# Altium PCB BTVN3.PcbDoc
Units mm, origin at the board's own origin, x right, y up, seen from the top; angles counter-clockwise.
Board outline 49.03 x 25.91 mm, 2 copper layers (Top Layer, Bottom Layer); 8 components, 5 nets, 25 pads, 0 vias.
Unrouted connection lines stored in the file: 1.
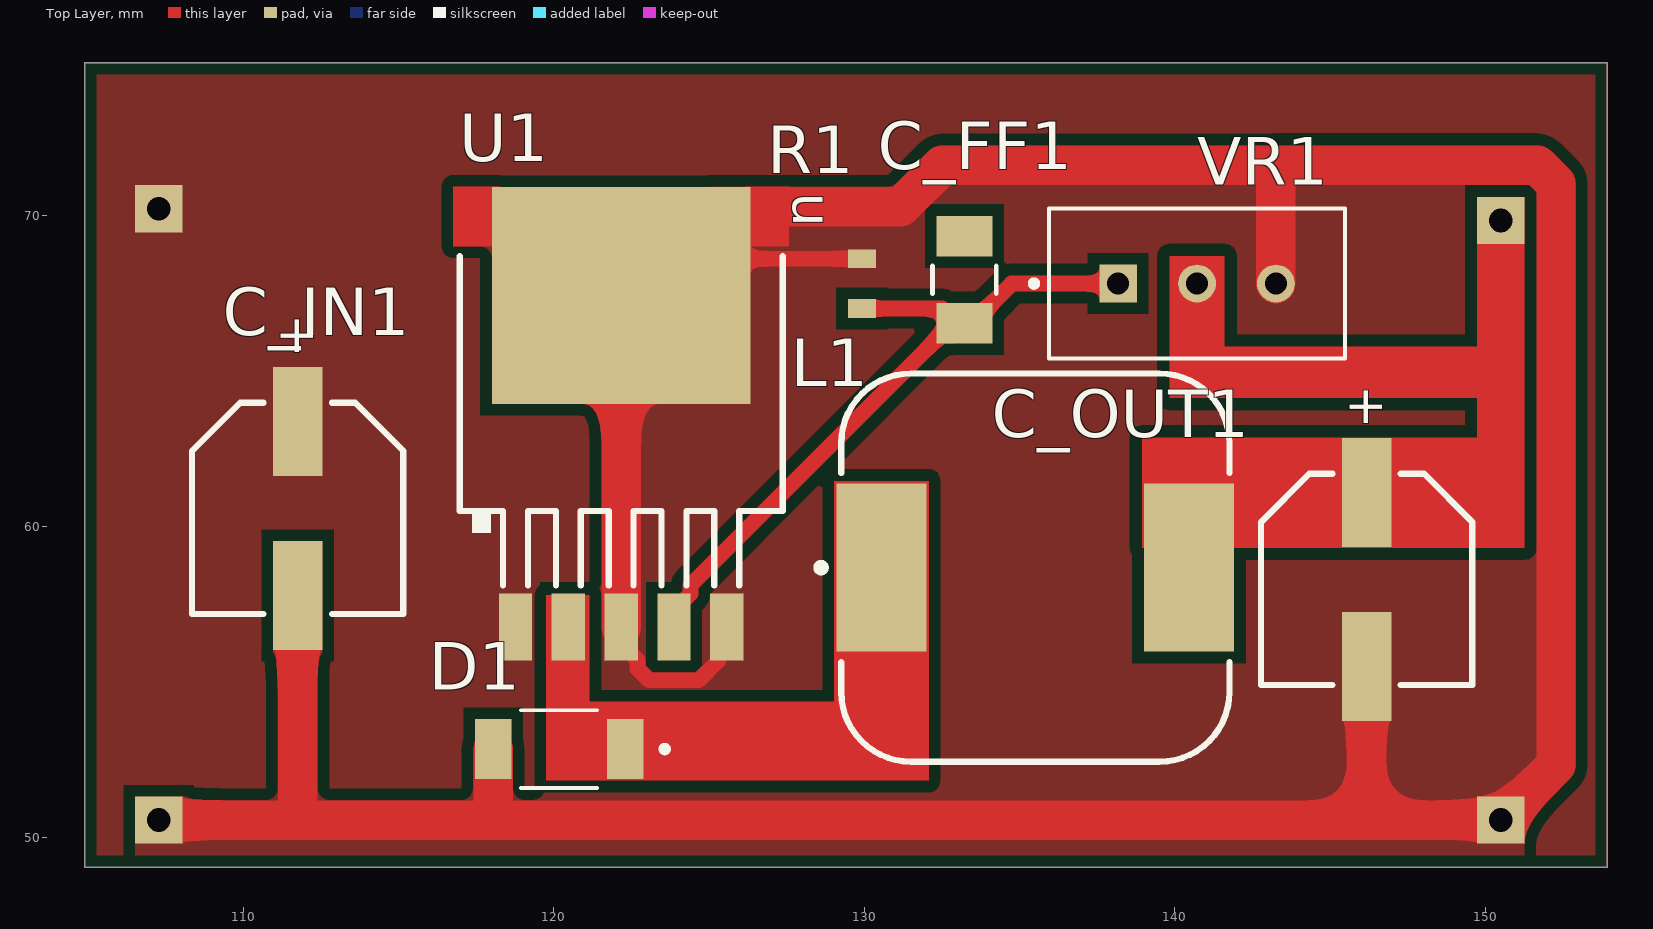
[diagram p0: Top Layer view]
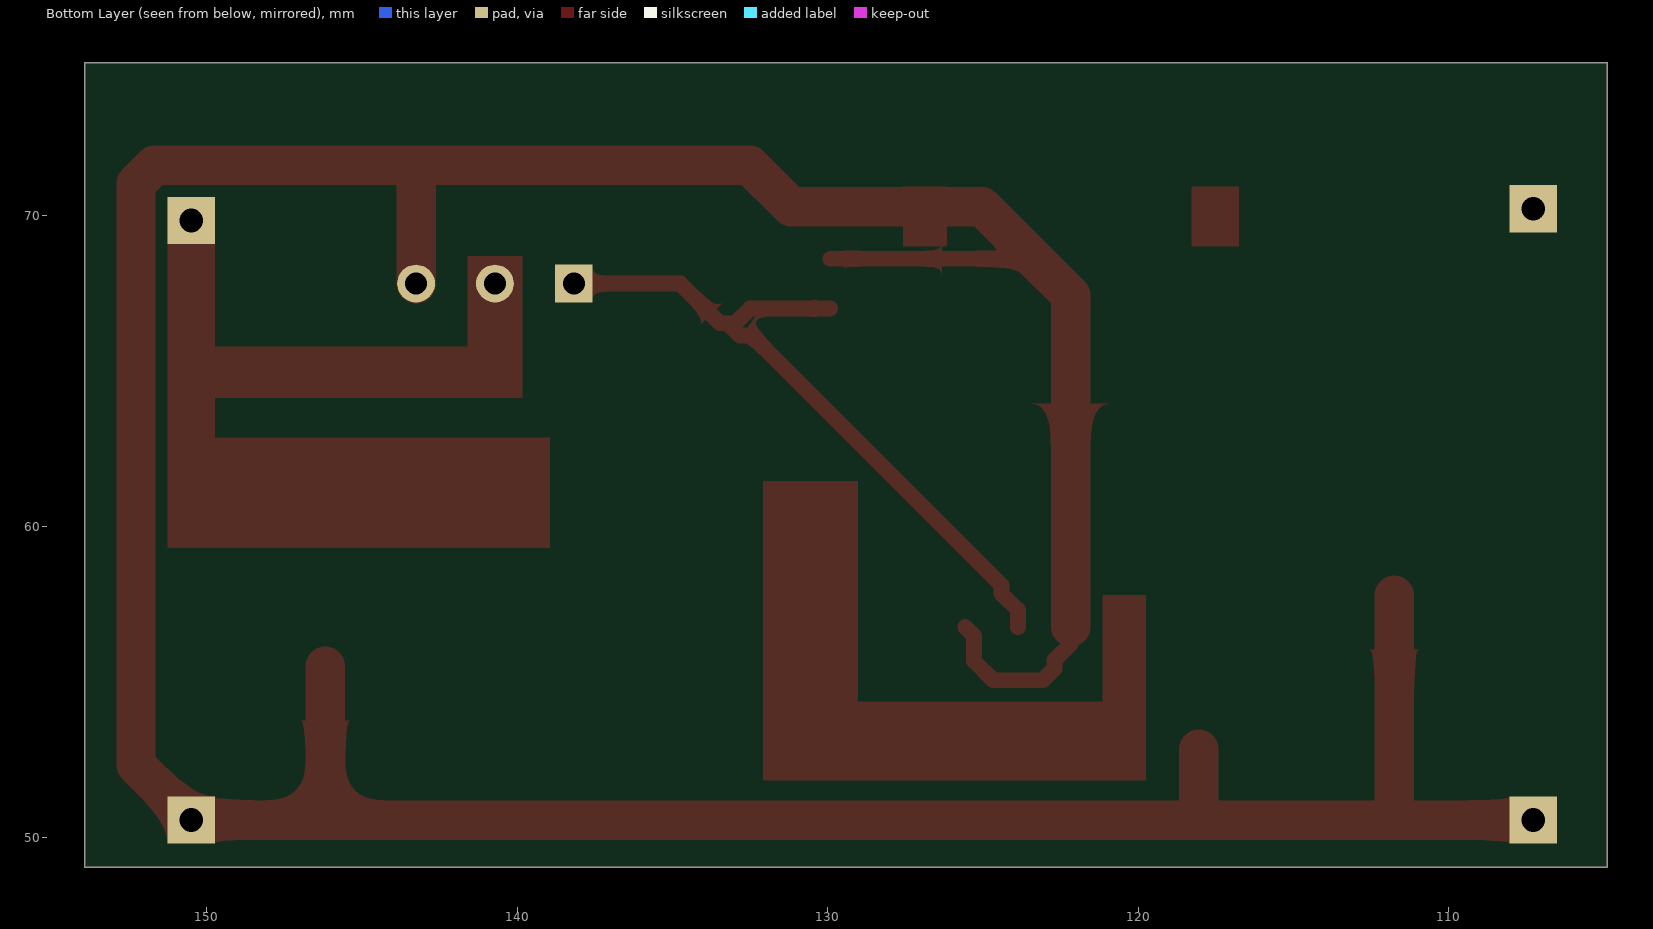
[diagram p1: Bottom Layer view, seen from below]
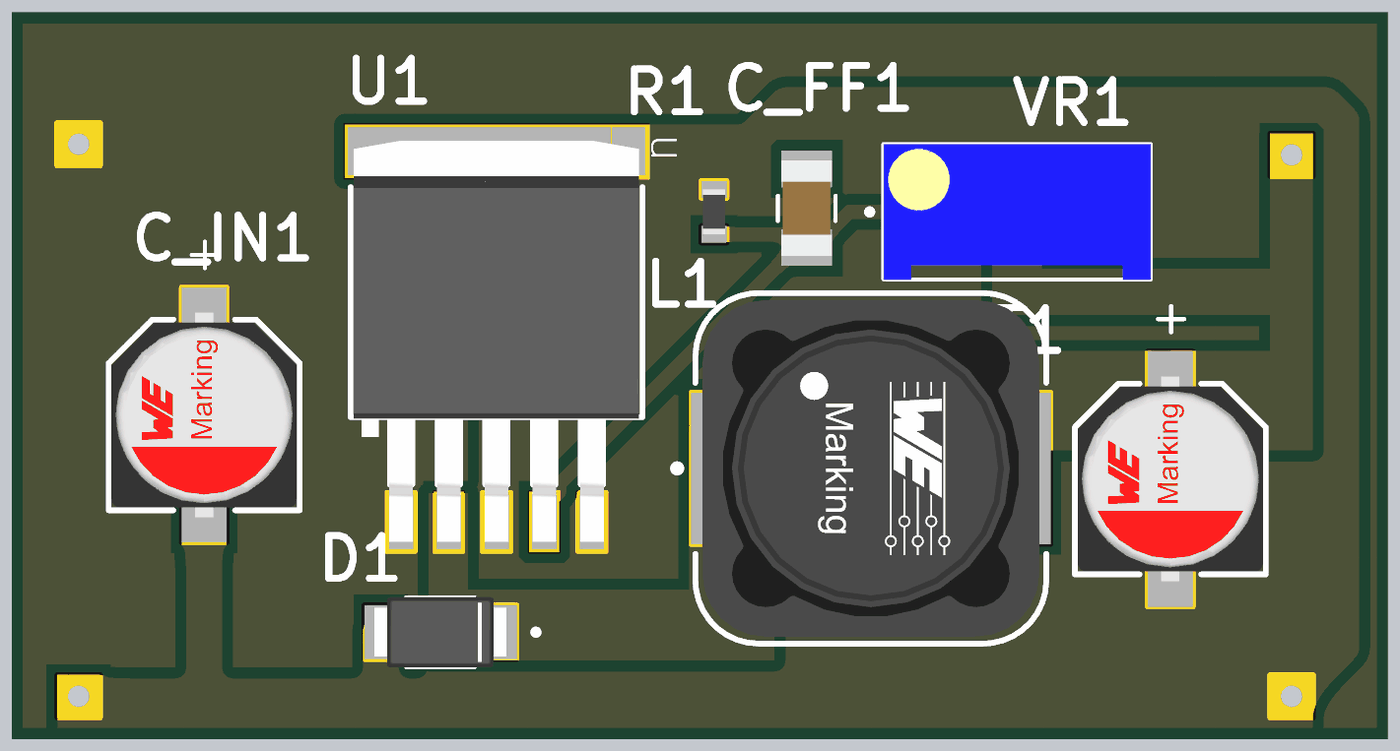
[diagram p2: 3D render of the assembled board from above, using the file's embedded part models]

## Layer stack, top to bottom
Top Solder: solder mask 0.0102, Solder Resist, Dk 3.5
Top Layer: signal copper 0.0356
Dielectric 1: dielectric 0.32, FR-4, Dk 4.8
Bottom Layer: signal copper 0.0356
Bottom Solder: solder mask 0.0102, Solder Resist, Dk 3.5

## Board outline
104.902,49.019 153.924,49.019 153.927,49.022 153.927,74.93 153.924,74.933 104.902,74.933 104.899,74.93

## Design rules (kind name [scope] priority, off if disabled: settings)
Clearance [All] p1: gap=0.381 ignorepadtopadclearanceinfootprint=FALSE
PlaneConnect [All] p1: planeconnectstyle=Direct reliefexpansion=0.508 reliefentries=4 reliefconductorwidth=0.254 reliefairgap=0.254
PolygonConnect PolygonConnect_12 [All vs IsNamedPolygon('GND_L01_P002')] p1: thpad.connectstyle=Direct thpad.reliefconductorwidth=0.254 thpad.reliefentries=4 thpad.polygonreliefangle="90 Angle" thpad.airgapwidth=0.254 smdpad.connectstyle=Direct smdpad.reliefconductorwidth=0.254 smdpad.reliefentries=4 smdpad.polygonreliefangle="90 Angle" smdpad.airgapwidth=0.254 via.connectstyle=Relief via.reliefconductorwidth=0.254 via.reliefentries=4 via.polygonreliefangle="90 Angle" via.airgapwidth=0.254
PolygonConnect PolygonConnect_11 [All vs IsNamedPolygon('VCC_L01_P001')] p2: thpad.connectstyle=Direct thpad.reliefconductorwidth=0.254 thpad.reliefentries=4 thpad.polygonreliefangle="90 Angle" thpad.airgapwidth=0.254 smdpad.connectstyle=Direct smdpad.reliefconductorwidth=0.254 smdpad.reliefentries=4 smdpad.polygonreliefangle="90 Angle" smdpad.airgapwidth=0.254 via.connectstyle=Relief via.reliefconductorwidth=0.254 via.reliefentries=4 via.polygonreliefangle="90 Angle" via.airgapwidth=0.254
PolygonConnect PolygonConnect_10 [All vs IsNamedPolygon('NONET_L01_P001')] p3: thpad.connectstyle=Direct thpad.reliefconductorwidth=0.254 thpad.reliefentries=4 thpad.polygonreliefangle="90 Angle" thpad.airgapwidth=0.254 smdpad.connectstyle=Direct smdpad.reliefconductorwidth=0.254 smdpad.reliefentries=4 smdpad.polygonreliefangle="90 Angle" smdpad.airgapwidth=0.254 via.connectstyle=Relief via.reliefconductorwidth=0.254 via.reliefentries=4 via.polygonreliefangle="90 Angle" via.airgapwidth=0.254
PolygonConnect PolygonConnect_9 [All vs IsNamedPolygon('VCC_L01_P000')] p4: thpad.connectstyle=Direct thpad.reliefconductorwidth=0.254 thpad.reliefentries=4 thpad.polygonreliefangle="90 Angle" thpad.airgapwidth=0.254 smdpad.connectstyle=Direct smdpad.reliefconductorwidth=0.254 smdpad.reliefentries=4 smdpad.polygonreliefangle="90 Angle" smdpad.airgapwidth=0.254 via.connectstyle=Relief via.reliefconductorwidth=0.254 via.reliefentries=4 via.polygonreliefangle="90 Angle" via.airgapwidth=0.254
PolygonConnect PolygonConnect_8 [All vs IsNamedPolygon('VCC_L01_P000')] p5: thpad.connectstyle=Direct thpad.reliefconductorwidth=0.254 thpad.reliefentries=4 thpad.polygonreliefangle="90 Angle" thpad.airgapwidth=0.254 smdpad.connectstyle=Direct smdpad.reliefconductorwidth=0.254 smdpad.reliefentries=4 smdpad.polygonreliefangle="90 Angle" smdpad.airgapwidth=0.254 via.connectstyle=Relief via.reliefconductorwidth=0.254 via.reliefentries=4 via.polygonreliefangle="90 Angle" via.airgapwidth=0.254
PolygonConnect PolygonConnect_7 [All vs IsNamedPolygon('NONET_L01_P000')] p6: thpad.connectstyle=Direct thpad.reliefconductorwidth=0.254 thpad.reliefentries=4 thpad.polygonreliefangle="90 Angle" thpad.airgapwidth=0.254 smdpad.connectstyle=Direct smdpad.reliefconductorwidth=0.254 smdpad.reliefentries=4 smdpad.polygonreliefangle="90 Angle" smdpad.airgapwidth=0.254 via.connectstyle=Relief via.reliefconductorwidth=0.254 via.reliefentries=4 via.polygonreliefangle="90 Angle" via.airgapwidth=0.254
PolygonConnect PolygonConnect_6 [All vs IsNamedPolygon('VCC_L01_P002')] p7: thpad.connectstyle=Direct thpad.reliefconductorwidth=0.254 thpad.reliefentries=4 thpad.polygonreliefangle="90 Angle" thpad.airgapwidth=0.254 smdpad.connectstyle=Direct smdpad.reliefconductorwidth=0.254 smdpad.reliefentries=4 smdpad.polygonreliefangle="90 Angle" smdpad.airgapwidth=0.254 via.connectstyle=Relief via.reliefconductorwidth=0.254 via.reliefentries=4 via.polygonreliefangle="90 Angle" via.airgapwidth=0.254
PolygonConnect PolygonConnect_5 [All vs IsNamedPolygon('VCC_L01_P002')] p8: thpad.connectstyle=Direct thpad.reliefconductorwidth=0.254 thpad.reliefentries=4 thpad.polygonreliefangle="90 Angle" thpad.airgapwidth=0.254 smdpad.connectstyle=Direct smdpad.reliefconductorwidth=0.254 smdpad.reliefentries=4 smdpad.polygonreliefangle="90 Angle" smdpad.airgapwidth=0.254 via.connectstyle=Relief via.reliefconductorwidth=0.254 via.reliefentries=4 via.polygonreliefangle="90 Angle" via.airgapwidth=0.254
PolygonConnect PolygonConnect_4 [All vs IsNamedPolygon('NONET_L01_P002')] p9: thpad.connectstyle=Direct thpad.reliefconductorwidth=0.254 thpad.reliefentries=4 thpad.polygonreliefangle="90 Angle" thpad.airgapwidth=0.254 smdpad.connectstyle=Direct smdpad.reliefconductorwidth=0.254 smdpad.reliefentries=4 smdpad.polygonreliefangle="90 Angle" smdpad.airgapwidth=0.254 via.connectstyle=Relief via.reliefconductorwidth=0.254 via.reliefentries=4 via.polygonreliefangle="90 Angle" via.airgapwidth=0.254
PolygonConnect PolygonConnect_3 [All vs IsNamedPolygon('NONET_L01_P001')] p10: thpad.connectstyle=Direct thpad.reliefconductorwidth=0.254 thpad.reliefentries=4 thpad.polygonreliefangle="90 Angle" thpad.airgapwidth=0.254 smdpad.connectstyle=Direct smdpad.reliefconductorwidth=0.254 smdpad.reliefentries=4 smdpad.polygonreliefangle="90 Angle" smdpad.airgapwidth=0.254 via.connectstyle=Relief via.reliefconductorwidth=0.254 via.reliefentries=4 via.polygonreliefangle="90 Angle" via.airgapwidth=0.254
PolygonConnect PolygonConnect_2 [All vs IsNamedPolygon('NONET_L01_P000')] p11: thpad.connectstyle=Direct thpad.reliefconductorwidth=0.254 thpad.reliefentries=4 thpad.polygonreliefangle="90 Angle" thpad.airgapwidth=0.254 smdpad.connectstyle=Direct smdpad.reliefconductorwidth=0.254 smdpad.reliefentries=4 smdpad.polygonreliefangle="90 Angle" smdpad.airgapwidth=0.254 via.connectstyle=Relief via.reliefconductorwidth=0.254 via.reliefentries=4 via.polygonreliefangle="90 Angle" via.airgapwidth=0.254
PolygonConnect PolygonConnect_1 [All vs IsNamedPolygon('NONET_L01_P000')] p12: thpad.connectstyle=Direct thpad.reliefconductorwidth=0.254 thpad.reliefentries=4 thpad.polygonreliefangle="90 Angle" thpad.airgapwidth=0.254 smdpad.connectstyle=Direct smdpad.reliefconductorwidth=0.254 smdpad.reliefentries=4 smdpad.polygonreliefangle="90 Angle" smdpad.airgapwidth=0.254 via.connectstyle=Relief via.reliefconductorwidth=0.254 via.reliefentries=4 via.polygonreliefangle="90 Angle" via.airgapwidth=0.254
PolygonConnect [All] p13: connectstyle=Relief reliefconductorwidth=0.254 reliefentries=4 polygonreliefangle="90 Angle" airgapwidth=0.254
RoutingVias [All] p1: holewidth=0.711 width=0.8 viastyle="Through Hole" minholewidth=0.711 minwidth=0.8 maxholewidth=0.711 maxwidth=0.8
SolderMaskExpansion [All] p1: expansion=0.102 istentingtop=FALSE
Width [All] p1: maxlimit=1.27 minlimit=0.508 preferedwidth=0.762 minimp=50.000000 maximp=50.000000 favimp=50.000000
29 further rules are at their usual default settings.

## Components (designator, comment, footprint, x,y, rotation, side; value= is the part's Value field where it differs from the comment)
C_FF1 "22nF" "CAPC340180_88N_KEM _1206" 133.223,67.945 r90 top
C_IN1 "470µF" WCAP-AS5H_D6.3H7.7 111.76,60.579 r90 top
C_OUT1 "220µF" WCAP-AS5H_D6.3H7.7 146.177,58.293 r90 top
D1 "Diode Schottky" SODFL4725X110N 120.176,52.832 r180 top
L1 "64uH" WE-PD_1210 135.509,58.674 r270 top
R1 "1kΩ" WRIS-PSMB_0603_L1.6W0.8H0.3 129.921,67.818 r270 top
U1 "LM2596S-12/NOPB" KTT0005B 122.174,62.099 r270 top
VR1 "1K" TRIM_3296W 140.716,67.818 r0 top

## Footprints (in the part's own frame and the unit in brackets; to place one, negate y for a bottom-side part, rotate by r counter-clockwise, add the part's x,y. Pads: shape width x height; smd on the part's side, far side on the other; paste and mask are expansions set on the pad)
"CAPC340180_88N_KEM _1206" [mm]
  rect 1.306x1.8 smd paste+0 mask+0: 1(-1.403,0) 2(1.403,0)
  silkscreen extent -0.44,-1.03 0.44,1.03, body extent -1.7,-0.9 1.7,0.9, height 0.88
KTT0005B [mm]
  rect 2.16x1.07 smd paste-0.102 mask+0.051: 1(5.338,-3.4) 2(5.338,-1.7) 3(5.338,0.005) 4(5.338,1.7) 5(5.338,3.4)
  rect 6.99x8.33 smd paste-0.102 mask+0.051: 6(-5.338,0)
  Top Layer region: -8.832,5.4 -8.832,4 -6.923,4 -6.923,5.4
  Top Layer region: -8.832,-3.9 -8.832,-5.4 -6.923,-5.4 -6.923,-3.9
  silkscreen extent -6.6,-5.2 4,5.2, body extent -8.26,-5.08 6.05,5.08, height 4.57
SODFL4725X110N [mm]
  rect 1.17x1.92 smd: C(-2.125,0) ""(2.125,0)
  silkscreen extent -3.5,-1.25 1.22,1.25, body extent -2.35,-1.25 2.35,1.25, height 1.1
TRIM_3296W [mm]
  rect 1.218x1.218 hole 0.71: 1(-2.54,0)
  round 1.218 hole 0.71: 2(0,0) 3(2.54,0)
  silkscreen extent -5.35,-2.41 4.76,2.42, body extent -4.76,-2.41 4.76,2.42, height 11.55
WCAP-AS5H_D6.3H7.7 [mm] "Aluminum Electrolytic Capacitors, 6.3x7.7mm"
  rect 3.5x1.6 smd: 1(2.8,0) 2(-2.8,0)
  silkscreen extent -3.4,-3.4 3.4,3.4, body extent -3.65,-3.3 3.65,3.3, height 7.7
WE-PD_1210 [mm] "SMT Shielded Power Inductor, 2-leads, body 12x12mm"
  rect 5.4x2.9 smd: 1(0,-4.95) 2(0,4.95)
  silkscreen extent -6.25,-7.02 6.25,6.25, body extent -6,-6 6,6, height 9.46
WRIS-PSMB_0603_L1.6W0.8H0.3 [mm] "Metal Plate Resistor, SMT, body size 1.6x0.8mm"
  rect 0.6x0.9 smd: 1(-0.8,0) 2(0.8,0)
  body extent -0.8,-0.4 0.8,0.4, height 0.3

## Part data
C_FF1: library part Capacitor_SMD, "No Description Available", Manufacturer_Part_Number=C1206C104K5RACTU, Mfr_Name=Kemet, Copyright="Copyright (C) 2023 Ultra Librarian. All rights reserved.", RefDes=RefDes, Type=DEV
C_IN1 C_OUT1: library part Capacitor_Alumanium_SMD, "WCAP-AS5H Aluminum Electrolytic Capacitor, V-Chip, D10 x H10.5mm, 330µF, 50V", Capacitance=330µF, Capacitance Tolerance=+/-20%, Leakage Current=165µA, Manufacturer="Wurth Elektronik", Manufacturer Part Number=865230657014, Operating Temperature Max=105°C, Operating Temperature Min=-55°C, Rated Voltage (DC)=50V, Ripple Current=900mA, Category="Aluminum Electrolytic Capacitors", ComponentLink1Description="Website Link", ComponentLink1URL=https://www.we-online.com/redexpert/article/865230657014?ad, ComponentLink2Description="Datasheet Link", ComponentLink2URL=https://www.we-online.com/redexpert/spec/865230657014?ad, Diameter=10mm, Dissipation Factor=12%, Endurance=5000h, Height=10.5mm, Match Code=WCAP-AS5H, Mount="Surface Mount", Packaging="Tape and Reel", Technical Reference=ASEF105331M050DVCTEE000
D1: "Diode Schottky ?V ?A Surface Mount SMC", Package="DO-214 ON Semiconductor", Arrow_Electronics-Purchase-URL=https://snapeda.com/shop?store=Arrow+Electronics&id=432205, Availability=Good, DigiKey-Purchase-URL=https://snapeda.com/shop?store=DigiKey&id=432205, MF="ON Semiconductor", Mouser-Purchase-URL=https://snapeda.com/shop?store=Mouser&id=432205, MP=MBRS320T3G, Price=None, SnapEDA_Link=https://www.snapeda.com/parts/MBRS320T3G/ON%20Semiconductor/view-part/432205/?ref=snap
L1: library part Inductor_SMD, "WE-PD SMT Power Inductor, size ?, ?uH, ?A, ?Ohm", Case/Size Code=1210, DC Resistance=1800mOhm, DC Resistance Max=2300mOhm, Inductance=1500uH, Manufacturer="Wurth Elektronik", Manufacturer Part Number=7447709152, Operating Temperature Max=125°C, Operating Temperature Min=-40°C, Rated Current=0.8A, Self Resonant Frequency=0.9MHz, Category="Power Inductors", ComponentLink1Description="Website Link", ComponentLink1URL=https://www.we-online.com/redexpert/article/7447709152?ad, ComponentLink2Description="Datasheet Link", ComponentLink2URL=https://www.we-online.com/redexpert/spec/7447709152?ad, Height=10mm, Length=12mm, Match Code=WE-PD, Mount="Surface Mount", Packaging="Tape and Reel", Saturation Current=0.8A, Type=Standard, Width=12mm
R1: library part Resistor_SMD, "WRIS-PSMC Metal Plate Resistor, SMT, size 2512, 2W, 5mΩ, +/-1%", Case/Size Code=2512, Manufacturer="Wurth Elektronik", Manufacturer Part Number=580070763005, Operating Temperature Max=155°C, Operating Temperature Min=-55°C, Rated Current=20A, Rated Power=2W, Resistance=5mΩ, Resistance Tolerance=+/-1%, Temperature Coefficient of Resistance=+/-100ppm/°C, Category="Metal Plate Resistors", ComponentLink1Description="Website Link", ComponentLink1URL=https://www.we-online.com/redexpert/article/580070763005?ad, ComponentLink2Description="Datasheet Link", ComponentLink2URL=https://www.we-online.com/redexpert/spec/580070763005?ad, Height=0.51mm, Length=6.3mm, Match Code=WRIS-PSMC, Mount="Surface Mount", Packaging="Tape and Reel", Technical Reference=MC2512R005F201KAATE0000, Width=3.1mm
U1: "No Description Available", Alternate_PartNumber=LM2596S-ADJ/NOPB, Manufacturer="Texas Instruments", PartNumber=LM2596SX-ADJ/NOPB, CompType=IC, Copyright="Copyright (C) 2023 Ultra Librarian. All rights reserved.", Manufacturer_Part_Number=LM2596S-12/NOPB, Mfr_Name="Texas Instruments", MountType=SMT, PackageReference=KTT0005B, RefDes=RefDes, RoHS=Y, Type=DEV
VR1: library part Variable_Resistor, "? Ohms 0.75W, 3/4W PC Pins Panel Mount, Through Hole Trimmer Potentiometer Cermet 15.0 Turn Side Adjustment", Package="NON-STANDARD-3 Bourns", Availability="In Stock", Check_prices=https://www.snapeda.com/parts/3006P-1-202/Bourns/view-part/?ref=eda, MF=Bourns, MP=3006P-1-202, Price=None, Purchase-URL=https://pricing.snapeda.com/search/part/3006P-1-202/?ref=eda, SnapEDA_Link=https://www.snapeda.com/parts/3006P-1-202/Bourns/view-part/?ref=snap

## Free pads (board coordinates)
  rect 1.524x1.524 hole 0.762: 8(107.287,70.231) 9(107.287,50.546) 10(150.495,69.85) 11(150.495,50.546)

## Nets (pads, with @x,y where several pads share a name; then routed paths per layer and width w, separated by ;. In a path a pad name is that pad's centre, name@x,y a point inside that pad or via, vN(x,y) a via of type N, cw(c..) or ccw(c..) an arc to the next point about the centre after c; other vN are vias at no path point)
GND: C_IN1.2 C_OUT1.2 D1. pad.9 pad.11 R1.1 U1.3 U1.5 U1.6 VR1.3 | length 137.9
  Top Layer w0.508: U1.3 122.179,56.217 122.704,55.692 122.704,55.419 123.076,55.047 124.672,55.047 125.293,55.668 125.293,56.481 U1.5 ; U1.6@123.355,68.618 R1.1
  Top Layer w1.27: pad.9 111.633,50.546 ; C_IN1.2 111.76,50.673 111.633,50.546 ; D1. 118.051,50.614 117.983,50.546 ; U1.3 122.179,67.432 U1.6 123.355,68.618 125.034,70.297 131.183,70.297 132.514,71.628 143.129,71.628 ; VR1.3 143.256,71.501 143.129,71.628 ; C_OUT1.2 146.177,50.546 ; 111.633,50.546 117.983,50.546 ; 117.983,50.546 146.177,50.546 ; 143.129,71.628 151.678,71.628 152.273,71.033 152.273,52.324 pad.11 146.177,50.546
NetC_FF1_1: C_FF1.1 R1.2 U1.4 VR1.1 | length 22.9
  Top Layer w0.508: U1.4 123.874,57.307 124.404,57.837 124.404,58.105 132.442,66.143 132.824,66.143 C_FF1.1 ; R1.2 132.5,67.018 132.976,66.542 C_FF1.1 ; VR1.1 134.746,67.818 133.47,66.542 C_FF1.1
NetC_FF1_2: C_FF1.2 C_OUT1.1 L1.2 pad.10 VR1.2
NetD1_C: D1.C L1.1 U1.2
VCC: C_IN1.1 pad.8 U1.1
copper on no net: | length 149.9
  Top Layer w0.005: 104.902,49.022 104.902,74.93 153.924,74.93 153.924,49.022 104.902,49.022

## Polygon pours and split planes (outlines as drawn)
GND on Top Layer "GND_L01_P002" (solid, remove dead copper, pour order 2): 104.902,49.019 153.924,49.019 153.927,49.022 153.927,74.93 153.924,74.933 104.902,74.933 104.899,74.93
VCC on Top Layer "VCC_L01_P001" (solid, remove dead copper, pour order 1): 104.902,49.019 153.924,49.019 153.927,49.022 153.927,74.93 153.924,74.933 104.902,74.933 104.899,74.93

## Other copper
Top Layer:
  rectangle net NetC_FF1_2: 139.827,64.135 151.257,65.786
  rectangle net NetC_FF1_2: 139.827,64.135 141.605,68.707
  rectangle net NetC_FF1_2: 138.938,59.309 151.257,62.865
  rectangle net NetC_FF1_2: 149.733,59.309 151.257,70.612
  rectangle net NetD1_C: 129.032,51.816 132.08,61.468
  rectangle net NetD1_C: 119.761,51.816 132.08,54.356
  rectangle net NetD1_C: 119.761,51.816 121.158,57.785

## Text inside footprints (layer, text, board x,y; h text height)
C_IN1: Top Overlay "+" at 112.26,65.429 h1.22 r90
C_OUT1: Top Overlay "+" at 146.677,63.143 h1.22 r90
U1: Top Overlay "u" at 127.711,70.735 h1.27 r270